# EAGLE board 2nx_interleaved_dip2eagle (EAGLE 7.5.0)
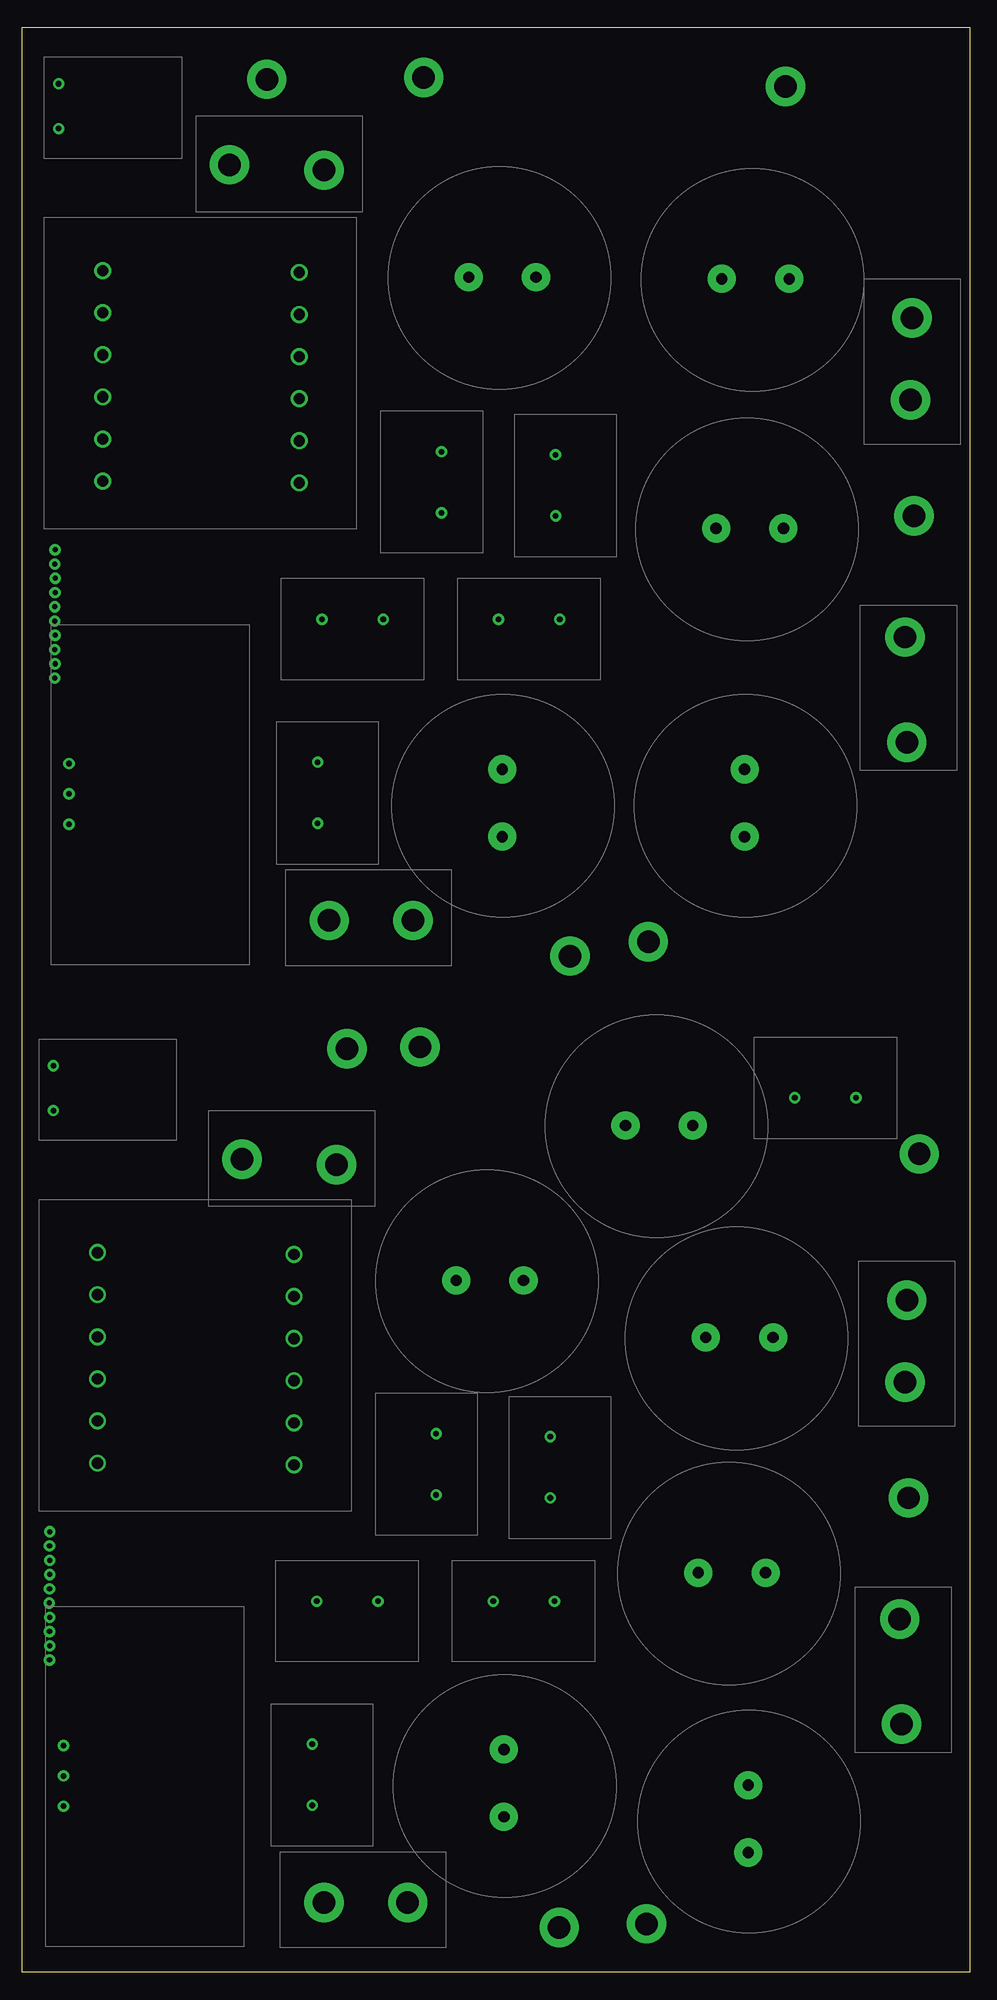
[diagram p0: board, top side]
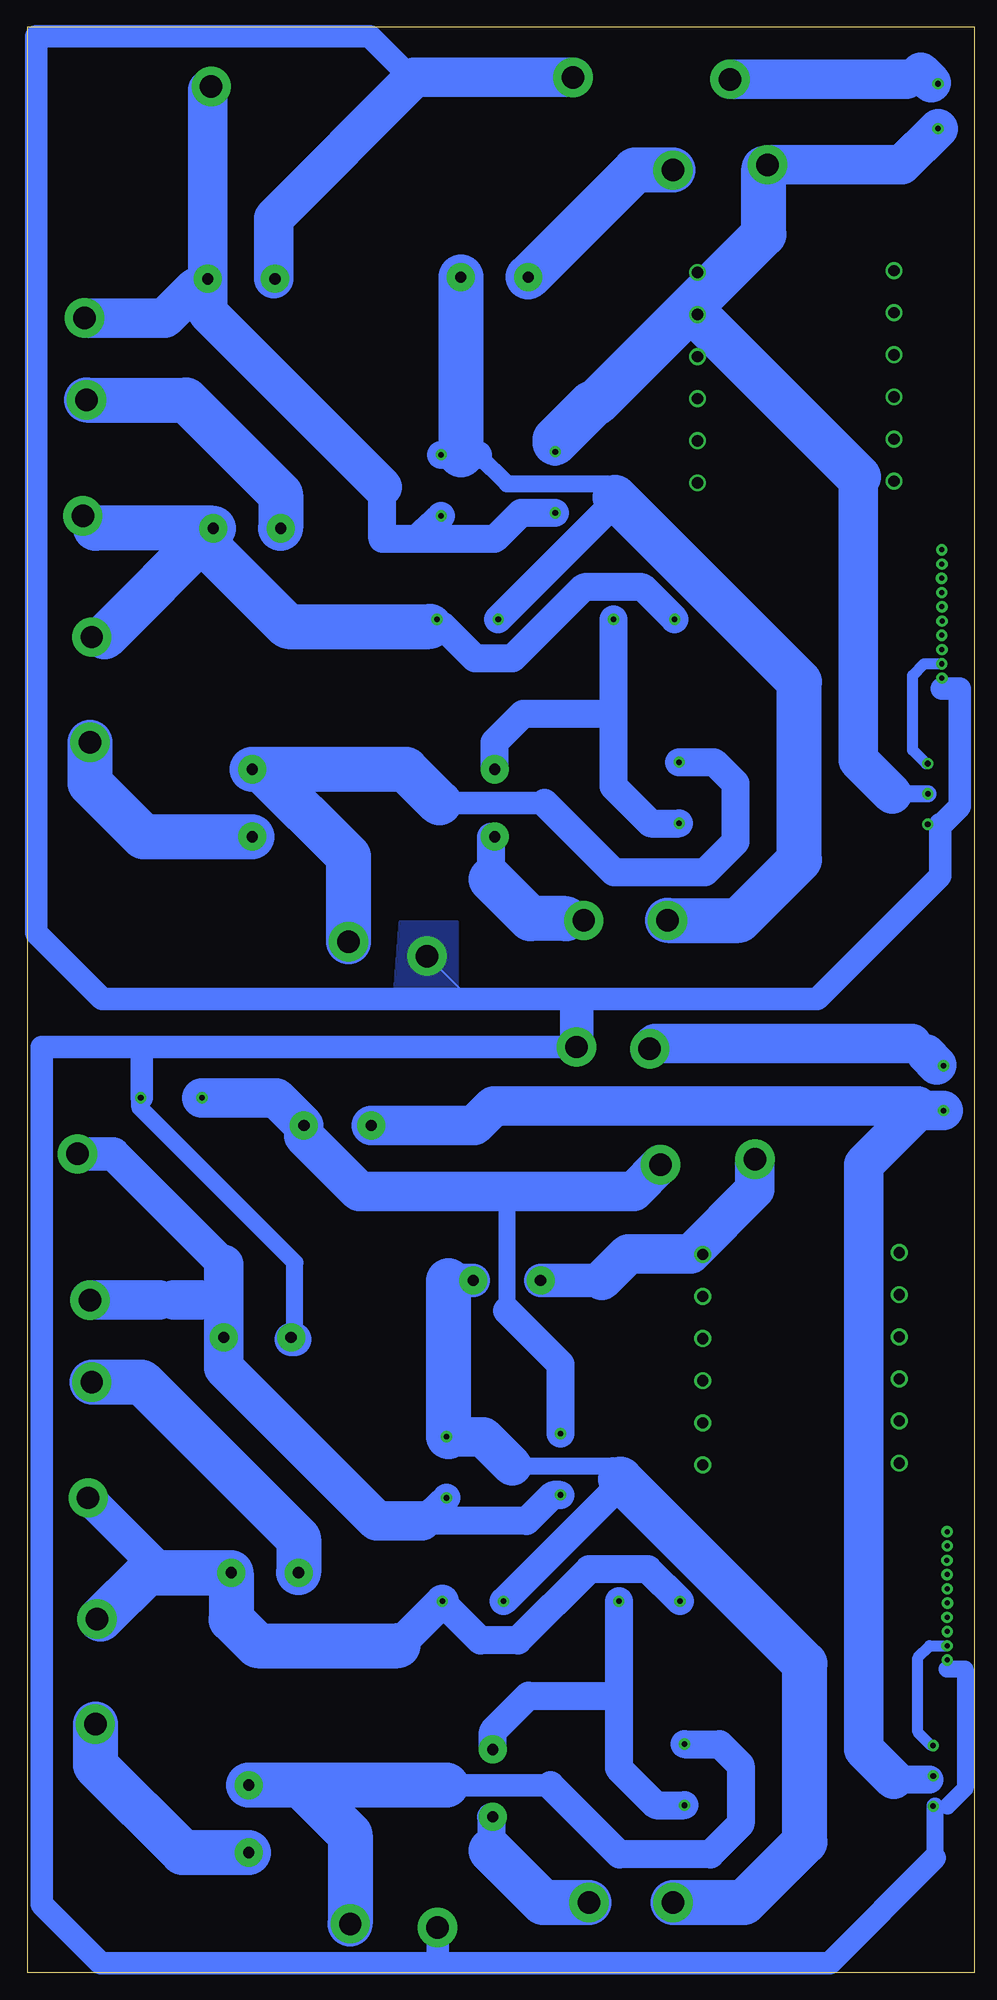
[diagram p1: board, bottom side, seen from below]

Size 168.75 x 346.55 mm. Coordinates in mm from the lower left corner, seen from the top.
Outline: 0,346.55 168.75,346.55 168.75,0 0,0 0,346.55
Copper layers (1*16): Top 0.035mm / dielectric 1.5mm / Bottom 0.035mm
Design rules "default *": minimum track width 10mil, minimum drill 0.61mm, track to track 8mil, track to pad 8mil, pad to pad 8mil, via to via 8mil, smd to smd 8mil, copper to edge 40mil, drill to drill 8mil, minimum pad ring 0mil, minimum via ring 8mil, stop-mask expansion 4mil, vias tented up to drill 20mil, thermal gap 10mil
Net classes: 0 Default: width 0.3 mm, drill 0.3 mm, clearance 0.203 mm

## Footprints (pad centres in the part's own frame; a part is rotated, then mirrored left to right if it is on the bottom)
Pad = drill 4 pad 7: 1 0,0
PAD1 = drill 1 pad 2: 1 0,0
Pad_Pad2 = drill 2 pad 3: 1 0,0
Pad_Pad14 = drill 2 pad 5: 1 0,0
Pad_Pad29 = drill 0.9 pad 2: 1 0,0
P116 = drill 1 pad 2: 1 0,0.005; 1_1 -5.398,-0.005; 1_1 5.398,-0.005
P117 = drill 1 pad 2: 1 0,0.005; 1_1 -5.398,-0.005; 1_1 5.398,-0.005
P118 = drill 1 pad 2: 1 5.45,2.765; 1_1 -5.45,2.763
P119 = drill 1 pad 2: 1 5.45,2.765; 1_1 -5.45,2.763

## Placement (x,y rotation side)
Pad1  [Pad]  71.52,337.58 270 bottom
PAD1  [PAD1]  95.01,259.48 90 top
PAD2  [PAD1]  95.01,270.38 90 top
Pad2  [Pad_Pad2]  14.37,303.17 0 bottom
PAD3  [PAD1]  6.5,328.47 90 top
Pad3  [Pad_Pad2]  14.37,295.67 0 bottom
PAD4  [PAD1]  6.5,336.47 90 top
Pad4  [Pad_Pad2]  14.37,288.17 0 bottom
PAD5  [PAD1]  53.42,241.06 0 top
Pad5  [Pad_Pad2]  14.37,280.67 0 bottom
PAD6  [PAD1]  64.32,241.06 0 top
Pad6  [Pad_Pad2]  14.37,273.17 0 bottom
PAD7  [PAD1]  52.63,204.71 90 top
Pad7  [Pad_Pad2]  14.37,265.67 0 bottom
PAD8  [PAD1]  52.62,215.61 90 top
Pad8  [Pad_Pad2]  49.37,302.85 0 bottom
Pad9  [Pad_Pad2]  49.37,295.35 0 bottom
PAD9  [PAD1]  84.85,241.06 0 top
Pad10  [Pad_Pad2]  49.37,287.85 0 bottom
PAD10  [PAD1]  95.75,241.06 0 top
Pad11  [Pad_Pad2]  49.37,280.35 0 bottom
PAD11  [PAD1]  52.47,66.12 0 top
Pad12  [Pad_Pad2]  49.37,272.85 0 bottom
PAD12  [PAD1]  51.67,29.77 90 top
Pad13  [Pad_Pad2]  49.37,265.35 0 bottom
PAD13  [PAD1]  5.55,153.53 90 top
Pad14  [Pad_Pad14]  91.52,302.02 90 bottom
PAD14  [PAD1]  94.06,84.53 90 top
Pad15  [Pad_Pad14]  79.52,302.02 90 bottom
PAD15  [PAD1]  94.06,95.43 90 top
Pad16  [Pad_Pad14]  85.49,214.33 0 bottom
PAD16  [PAD1]  5.55,161.53 90 top
Pad17  [Pad_Pad14]  85.49,202.33 0 bottom
PAD17  [PAD1]  63.37,66.12 0 top
Pad18  [Pad_Pad14]  128.67,214.33 0 bottom
PAD18  [PAD1]  51.67,40.67 90 top
Pad19  [Pad_Pad14]  128.67,202.33 0 bottom
PAD19  [PAD1]  83.9,66.12 0 top
Pad20  [Pad_Pad14]  135.59,257.25 90 bottom
PAD20  [PAD1]  94.8,66.12 0 top
Pad21  [Pad_Pad14]  123.59,257.25 90 bottom
PAD21  [PAD1]  148.51,155.81 180 top
Pad22  [Pad_Pad14]  136.6,301.7 90 bottom
PAD22  [PAD1]  137.61,155.81 180 top
Pad23  [Pad_Pad14]  124.6,301.7 90 bottom
Pad24  [Pad]  135.97,335.99 270 bottom
Pad25  [Pad]  158.51,294.72 270 bottom
Pad26  [Pad]  158.19,280.11 270 bottom
Pad27  [Pad]  97.55,181.05 270 bottom
Pad28  [Pad]  158.83,259.48 270 bottom
Pad29  [Pad_Pad29]  5.82,230.58 180 bottom
Pad30  [Pad]  157.24,237.89 270 bottom
Pad31  [Pad]  157.56,219.15 270 bottom
Pad32  [Pad]  54.69,187.4 270 bottom
Pad33  [Pad]  69.61,187.4 270 bottom
Pad34  [Pad]  111.52,183.59 270 bottom
Pad35  [Pad]  53.74,321.07 270 bottom
Pad36  [Pad]  36.91,322.02 270 bottom
Pad37  [Pad_Pad29]  5.85,245.82 180 bottom
Pad38  [Pad_Pad29]  5.88,248.36 180 bottom
Pad39  [Pad_Pad29]  5.82,250.9 180 bottom
Pad40  [Pad_Pad29]  5.85,253.44 180 bottom
Pad41  [Pad_Pad29]  5.82,235.66 180 bottom
Pad42  [Pad_Pad29]  5.85,238.2 180 bottom
Pad43  [Pad_Pad29]  5.79,240.74 180 bottom
Pad44  [Pad_Pad29]  5.82,243.28 180 bottom
Pad45  [Pad]  43.58,337.26 270 bottom
Pad46  [Pad_Pad29]  5.85,233.12 180 bottom
Pad47  [Pad]  57.86,164.54 270 bottom
Pad48  [Pad]  70.88,164.86 270 bottom
Pad49  [Pad_Pad2]  13.41,128.23 0 bottom
Pad50  [Pad_Pad2]  13.41,120.73 0 bottom
Pad51  [Pad_Pad2]  13.41,113.23 0 bottom
Pad52  [Pad_Pad2]  13.41,105.73 0 bottom
Pad53  [Pad_Pad2]  13.41,98.23 0 bottom
Pad54  [Pad_Pad2]  13.41,90.73 0 bottom
Pad55  [Pad_Pad2]  48.41,127.91 0 bottom
Pad56  [Pad_Pad2]  48.41,120.41 0 bottom
Pad57  [Pad_Pad2]  48.41,112.91 0 bottom
Pad58  [Pad_Pad2]  48.41,105.41 0 bottom
Pad59  [Pad_Pad2]  48.41,97.91 0 bottom
Pad60  [Pad_Pad2]  48.41,90.41 0 bottom
Pad61  [Pad_Pad14]  89.3,123.27 90 bottom
Pad62  [Pad_Pad14]  77.3,123.27 90 bottom
Pad63  [Pad_Pad14]  85.8,39.7 0 bottom
Pad64  [Pad_Pad14]  85.8,27.7 0 bottom
Pad65  [Pad_Pad14]  129.3,33.35 0 bottom
Pad66  [Pad_Pad14]  129.3,21.35 0 bottom
Pad67  [Pad_Pad14]  132.41,71.2 90 bottom
Pad68  [Pad_Pad14]  120.41,71.2 90 bottom
Pad69  [Pad_Pad14]  133.75,113.11 90 bottom
Pad70  [Pad_Pad14]  121.75,113.11 90 bottom
Pad71  [Pad]  159.78,145.81 270 bottom
Pad72  [Pad]  157.56,119.78 270 bottom
Pad73  [Pad]  157.24,105.17 270 bottom
Pad74  [Pad]  157.88,84.53 270 bottom
Pad75  [Pad]  156.29,62.94 270 bottom
Pad76  [Pad]  156.61,44.21 270 bottom
Pad77  [Pad]  53.74,12.46 270 bottom
Pad78  [Pad]  68.66,12.46 270 bottom
Pad79  [Pad]  111.2,8.65 270 bottom
Pad80  [Pad]  55.96,143.91 270 bottom
Pad81  [Pad]  39.13,144.86 270 bottom
Pad82  [Pad]  95.65,8.02 270 bottom
Pad83  [Pad_Pad29]  4.9,70.88 180 bottom
Pad84  [Pad_Pad29]  4.93,73.42 180 bottom
Pad85  [Pad_Pad29]  4.87,75.96 180 bottom
Pad86  [Pad_Pad29]  4.9,78.5 180 bottom
Pad87  [Pad_Pad29]  4.87,60.72 180 bottom
Pad88  [Pad_Pad29]  4.9,63.26 180 bottom
Pad89  [Pad_Pad29]  4.84,65.8 180 bottom
Pad90  [Pad_Pad29]  4.87,68.34 180 bottom
Pad91  [Pad_Pad29]  4.87,55.64 180 bottom
Pad92  [Pad_Pad29]  4.9,58.18 180 bottom
Pad93  [Pad_Pad14]  119.46,150.89 90 bottom
Pad94  [Pad_Pad14]  107.46,150.89 90 bottom
U1  [P116]  8.33,209.95 90 top
U2  [P117]  7.38,35 90 top
U3  [P118]  71.93,265.46 270 top
U4  [P119]  70.98,90.51 270 top

## Library data of the parts
Pad1 PAD1 PAD2 Pad2 PAD3 Pad3 PAD4 Pad4 PAD5 Pad5 PAD6 Pad6 PAD7 Pad7 PAD8 Pad8 Pad9 PAD9 Pad10 PAD10 Pad11 PAD11 Pad12 PAD12 Pad13 PAD13 Pad14 PAD14 Pad15 PAD15 Pad16 PAD16 Pad17 PAD17 Pad18 PAD18 Pad19 PAD19 Pad20 PAD20 Pad21 PAD21 Pad22 PAD22 Pad23-Pad94 U1-U4 = common

## Nets
Net_0: PAD4.1 Pad45.1
Net_1: PAD3.1 Pad36.1 U1.1 U3.1_1
Net_2: PAD2.1 PAD9.1 Pad14.1 Pad32.1
Net_3: PAD1.1 Pad22.1 Pad24.1 Pad25.1 U3.1
Net_4: Pad1.1 PAD21.1 Pad23.1 Pad27.1 Pad29.1 Pad48.1 Pad70.1 Pad82.1 Pad91.1 U1.1_1 U2.1_1
Net_5: PAD5.1 PAD10.1 Pad20.1 Pad28.1 Pad30.1
Net_6: PAD6.1 PAD7.1 Pad16.1
Net_7: PAD8.1 Pad18.1 Pad34.1
Net_8: Pad17.1
Net_9: Pad21.1 Pad26.1
Net_10: Pad19.1 Pad31.1
Net_11: Pad15.1 Pad35.1
Net_12: Pad46.1 U1.1_1
Net_13: PAD16.1 Pad47.1
Net_14: PAD13.1 Pad94.1 U2.1
Net_15: PAD15.1 PAD19.1 Pad61.1 Pad77.1
Net_16: PAD14.1 Pad69.1 Pad71.1 Pad72.1 U4.1
Net_18: PAD11.1 PAD20.1 Pad67.1 Pad74.1 Pad75.1
Net_19: PAD12.1 PAD17.1 Pad63.1
Net_20: PAD18.1 Pad65.1 Pad79.1
Net_21: Pad64.1 Pad78.1
Net_22: Pad68.1 Pad73.1
Net_23: Pad66.1 Pad76.1
Net_24: PAD22.1 Pad80.1 Pad93.1 U4.1_1
Net_25: Pad92.1 U2.1_1
Net_26: Pad62.1 Pad81.1

## Tracks (layer width: path | path; a pad name or v marks a point on that pad's centre or on a via)
Net_0
  Bottom 0.3: 12.14,337.26 12.14,338.53 9.6,338.53 | 7.7,336.63 6.66,336.63 PAD4.1
  Bottom 5: Pad45.1
  Bottom 7: Pad45.1 12.14,337.26 | 9.6,338.53 7.7,336.63
Net_1
  Bottom 0.3: 49.61,295.35 49.61,297.26
  Bottom 3: U1.1 14.68,209.95
  Bottom 4: 74.69,273.13 U3.1_1
  Bottom 5: U3.1_1 74.69,272.49
  Bottom 7: 14.68,209.95 20.72,215.98 20.72,266.46 | 37.54,321.39 Pad36.1 12.95,322.02 PAD3.1
  Bottom 8: 20.72,266.46 49.61,295.35 | 49.61,297.26 67.39,279.48 68.34,279.48 74.69,273.13 | 74.69,272.49 37.54,309.64 37.54,321.39
Net_2
  Bottom 0.3: 91.52,270.38 PAD2.1
  Bottom 3: 88.45,270.38 83.26,265.19 65.48,265.19 63.1,262.81
  Bottom 5: PAD2.1 88.45,270.38 | PAD9.1 63.1,262.81 64.06,262.81
  Bottom 8: Pad14.1 91.52,270.38 | Pad32.1 41.99,187.4 31.19,198.2 31.19,229.95 64.06,262.81
Net_3
  Bottom 0.3: 136.6,335.36 Pad24.1 | 138.83,300.12 138.19,300.12 Pad22.1
  Bottom 5: U3.1 80.83,260.01 85.49,255.35 99.46,255.35 | 99.46,255.35 105.49,255.35 105.49,264.56 | PAD1.1 99.46,255.35
  Bottom 7: 105.49,264.56 136.6,295.67 Pad22.1 136.6,335.36 | Pad25.1 144.22,294.72 138.83,300.12
Net_4
  Bottom 0.3: Pad23.1 124.86,301.7 | 8.33,204.55 6.11,204.55 5.79,204.55 | Pad29.1 5.82,228.68 | Pad27.1 97.44,181.05 89.82,173.43 | 70.88,171.42 72.9,173.43 | Pad70.1 121.75,112.79 | 7.38,29.61 7.06,29.61 4.84,29.61 | PAD21.1 148.35,155.81
  Bottom 2: Pad91.1 4.87,54.05
  Bottom 3: 121.05,112.79 121.05,126.44 148.67,154.07 148.67,164.86 Pad48.1 | 7.06,29.61 7.06,20.4 | 4.87,54.05 1.67,54.05 1.67,32.78 4.84,29.61
  Bottom 4: 6.11,204.55 6.11,195.34 28.02,173.43 72.9,173.43 89.82,173.43 155.34,173.43 167.08,185.18 167.08,344.88 107.71,344.88 100.41,337.58 Pad1.1 | 5.82,228.68 2.62,228.68 2.62,207.72 5.79,204.55 | 7.06,20.4 25.8,1.67 95.65,1.67 | 95.65,1.67 155.65,1.67 166.13,12.14 166.13,164.86 148.35,164.86 | 148.35,164.86 | 148.35,164.86 Pad48.1 | 148.35,155.81 148.35,164.86 | Pad82.1 95.65,1.67
  Bottom 6: Pad48.1 70.88,171.42 | 121.75,112.79 121.05,112.79
  Bottom 7: 124.86,301.7 124.86,312.5 99.77,337.58 Pad1.1
  pour Bottom (isolate 2, no thermals): 92.15,187.09 102.34,187.09 103.24,174.69 92.15,174.4
Net_5
  Bottom 0.3: 97.02,239.79 PAD10.1 95.01,240.32 95.01,240.11 | 138.19,256.3 136.54,256.3 Pad20.1 | 156.61,257.25 Pad28.1 | Pad30.1 154.95,237.89
  Bottom 5: Pad20.1 135.59,253.06 | PAD5.1 59.13,246.78 69.61,246.78 82.31,234.08 88.98,234.08 95.01,240.11
  Bottom 8: 135.59,253.06 122.32,239.79 97.02,239.79 | 156.61,257.25 Pad20.1 154.95,237.89
Net_6
  Bottom 5: PAD6.1 64.32,224.23 | 64.32,224.23 64.32,211.32 57.71,204.71 PAD7.1 | Pad16.1 85.49,219.15 80.41,224.23 64.32,224.23
Net_7
  Bottom 0.3: Pad18.1 127.01,214.33
  Bottom 4: 76.6,208.36 95.33,208.36
  Bottom 5: PAD8.1 46.38,215.61 42.62,211.85 42.62,201.37 48.02,195.98 64.21,195.98 76.6,208.36
  Bottom 8: 95.33,208.36 101.3,214.33 Pad18.1 | 127.01,214.33 111.52,198.83 Pad34.1
Net_8
  Bottom 0.3: 72.79,188.99 72.79,187.72
  Bottom 5: 86.12,194.71 86.12,202.33 Pad17.1
  Bottom 8: 72.79,187.72 79.14,187.72 86.12,194.71
Net_9
  Bottom 8: Pad26.1 140.41,280.11 123.59,263.29 Pad21.1
Net_10
  Bottom 8: Pad31.1 157.56,211.85 148.03,202.33 Pad19.1
Net_11
  Bottom 8: Pad35.1 60.47,321.07 Pad15.1
Net_12
  Bottom 2: U1.1_1 8.65,215.34 11.03,217.72 11.03,231.06 8.97,233.12 Pad46.1
Net_13
  Bottom 0.3: 11.19,165.5 11.19,163.59 8.65,163.59 | 6.75,161.69 5.71,161.69 PAD16.1
  Bottom 7: Pad47.1 56.91,165.5 11.19,165.5 | 8.65,163.59 6.75,161.69
Net_14
  Bottom 0.3: 8.01,34.37 U2.1
  Bottom 5: 14.37,34.37 8.01,34.37
  Bottom 7: PAD13.1 10.14,153.53 | 10.14,153.53 19.76,143.91 19.76,39.77 14.37,34.37 | Pad94.1 89.15,150.89 85.66,154.38 10.14,154.38 10.14,153.53
Net_15
  Bottom 0.3: 93.74,95.43 PAD15.1
  Bottom 3: 82.31,90.25 64.53,90.25 62.15,87.87
  Bottom 5: PAD19.1 62.15,87.87 63.1,87.87
  Bottom 6: Pad61.1 93.74,123.27
  Bottom 7: PAD15.1 87.5,95.43 82.31,90.25
  Bottom 8: 93.74,123.27 93.74,95.43 | Pad77.1 41.04,12.46 30.24,23.26 30.24,55.01 63.1,87.87
Net_16
  Bottom 0.3: 145.18,119.78 142.64,117.24 142.64,119.78 | 137.87,119.78 137.87,117.24 Pad69.1
  Bottom 5: U4.1 75.11,85.06 79.77,80.41 98.5,80.41 PAD14.1
  Bottom 6: 133.75,126.13 153.43,145.81 Pad71.1
  Bottom 7: 98.5,80.41 106.44,80.41 133.75,107.71 Pad69.1 133.75,126.13 | Pad72.1 145.18,119.78 | 142.64,119.78 137.87,119.78
Net_18
  Bottom 0.3: 94.06,65.17 94.06,65.38 PAD20.1 | Pad75.1 155.65,62.94
  Bottom 5: PAD11.1 58.18,71.83 68.66,71.83 81.36,59.13 88.03,59.13 94.06,65.17
  Bottom 6: 102.74,58.18 PAD20.1 | 144.54,71.2 Pad74.1
  Bottom 8: Pad67.1 132.41,62.88 127.71,58.18 102.74,58.18 | Pad67.1 144.54,71.2 | 155.65,62.94 147.4,71.2 Pad67.1
Net_19
  Bottom 5: PAD17.1 63.37,49.29 | 63.37,49.29 63.37,36.38 56.75,29.77 PAD12.1 | Pad63.1 85.8,42.94 79.45,49.29 63.37,49.29
Net_20
  Bottom 0.3: Pad65.1 120.03,33.35
  Bottom 4: 75.58,33.35 94.06,33.35
  Bottom 5: PAD18.1 45.43,40.66 41.67,36.91 41.67,26.43 47.07,21.03 63.26,21.03 75.58,33.35
  Bottom 8: 94.06,33.35 | 94.06,33.35 Pad65.1 | 120.03,33.35 111.2,24.53 Pad79.1
Net_21
  Bottom 0.3: Pad64.1 86.12,27.7
  Bottom 5: 86.12,27.7 86.12,21.67
  Bottom 8: 86.12,21.67 76.91,12.46 Pad78.1
Net_22
  Bottom 8: Pad73.1 148.35,105.17 120.41,77.23 Pad68.1
Net_23
  Bottom 8: Pad76.1 156.61,36.91 141.05,21.35 Pad66.1
Net_24
  Bottom 3: 83.26,117.87 83.26,139.14
  Bottom 5: U4.1_1 73.74,108.35 83.26,117.87
  Bottom 7: Pad80.1 60.72,139.14 83.26,139.14 109.62,139.14 119.46,148.99 Pad93.1 124.38,155.81 PAD22.1
Net_25
  Bottom 2: U2.1_1 7.7,40.4 10.08,42.78 10.08,56.12 8.02,58.18 Pad92.1
Net_26
  Bottom 6: 66.44,123.27 Pad62.1
  Bottom 7: Pad81.1 39.13,139.46 50.56,128.03 61.67,128.03 66.44,123.27

## Text on the board
tDocu: + | Vin1 | LP | J1 | + | + | LP | CP2 | CP1 | J2 | D2 | + | CP3 | D4 | D3 | J4 | + | + | CP4 | CP5 | D5 | SP | + | J3 | VOP | Vin2 | LP' | D0 | + | J1' | CP' | + | + | J3' | CP'2 | LP' | CP1' | D2 | + | D4 | D3 | CP3' | J4' | + | CP4' | + | D5 | SP' | CP5' | + | J2' | VOP'